# Altium PCB WDUExtensionBoard.PcbDoc
Units mm, origin at the board's own origin, x right, y up, seen from the top; angles counter-clockwise.
Board outline 97 x 22 mm, 2 copper layers (Top Layer, Bottom Layer); 36 components, 40 nets, 141 pads, 24 vias.
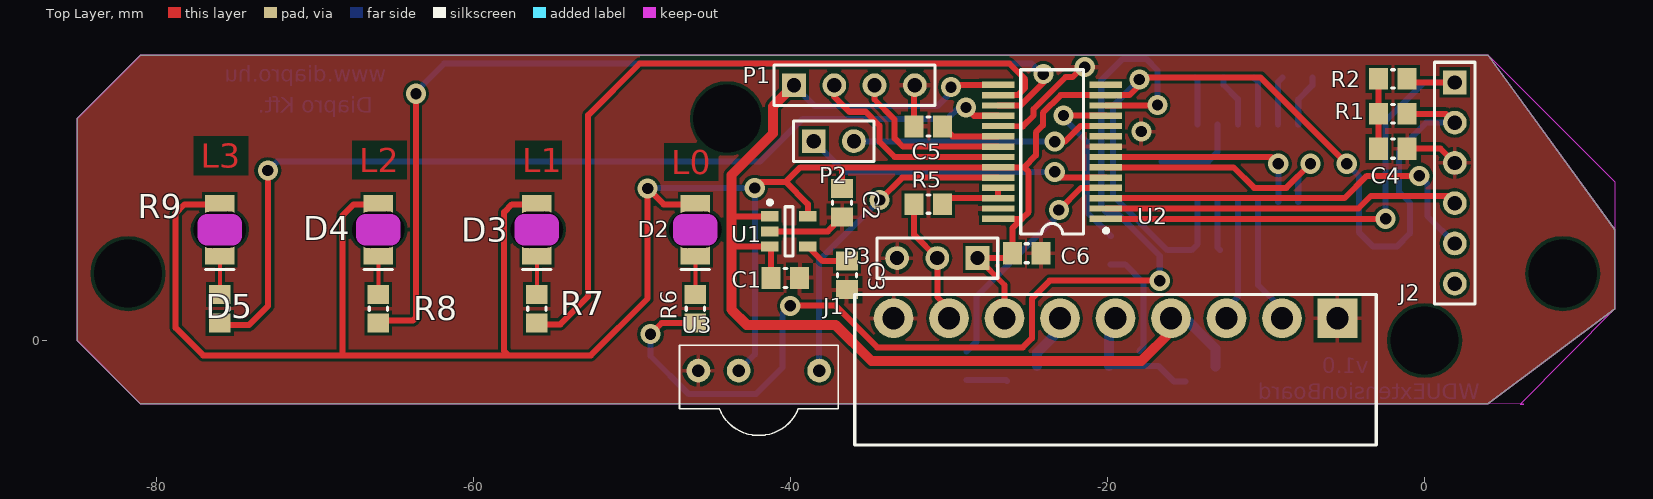
[diagram p0: Top Layer view]
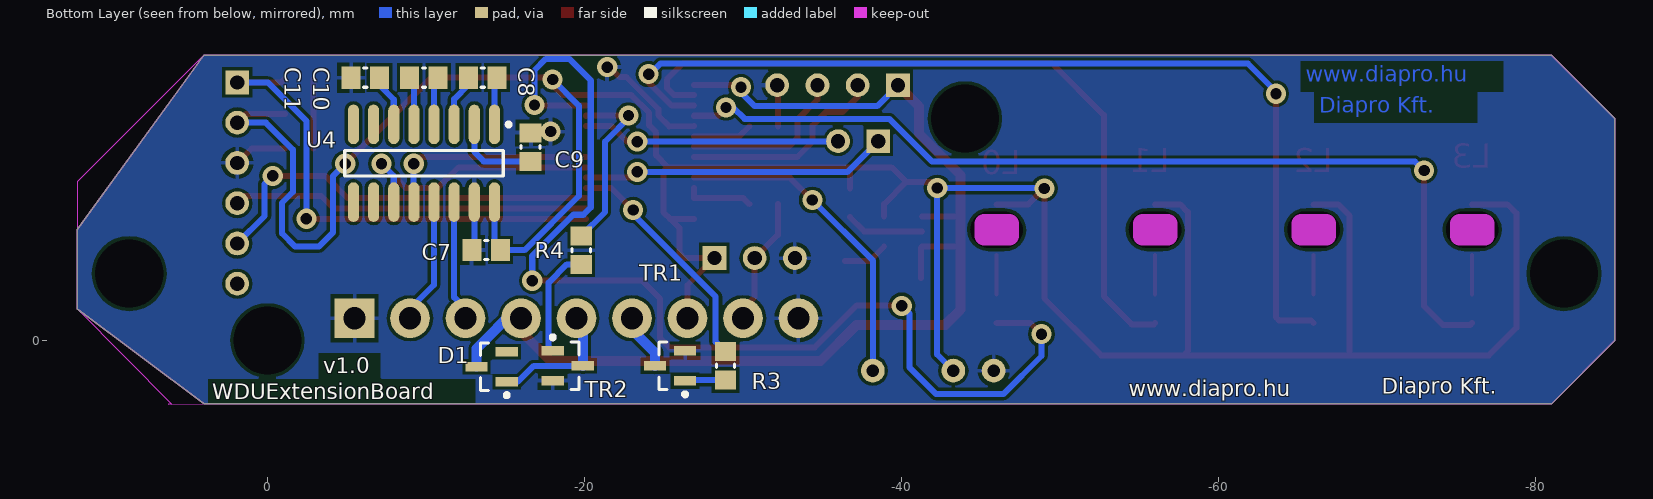
[diagram p1: Bottom Layer view, seen from below]

## Layer stack, top to bottom
Top Layer: signal copper 0.0356
Dielectric: dielectric 0.32, FR-4, Dk 4.8
Bottom Layer: signal copper 0.0356

## Board outline
-85,0 -85,14 -81,18 4,18 12,7 12,2 4,-4 -81,-4

## Design rules (kind name [scope] priority, off if disabled: settings)
AssemblyTestPointUsage [All] p1: valid=2
Clearance [Not OnLayer('Keep-Out Layer') vs Not OnLayer('Keep-Out Layer')] p1: gap=0.2
ComponentClearance [All] p1: gap=0 collisioncheckmode=3 verticalgap=0.254 showdistances=TRUE
FabricationTestpoint [All] p1 off: side=3 testpointundercomponent=TRUE minsize=1.016 maxsize=2.54 preferedsize=1.524 minholesize=0 maxholesize=1.016 preferedholesize=0.813 testpointgrid=0.025 allowsidetop=TRUE allowsidebottom=TRUE usegrid=TRUE gridtolerance=0
HoleSize [All] p1: absolutevalues=TRUE maxlimit=3.6 minlimit=0.025 maxpercent=80.000 minpercent=20.000
MinimumSolderMaskSliver [All] p1: minsoldermaskwidth=0
PolygonConnect [All] p1: connectstyle=Relief reliefconductorwidth=0.254 reliefentries=4 polygonreliefangle="90 Angle" airgapwidth=0.254
RoutingVias [All] p1: holewidth=0.254 width=0.762 viastyle="Through Hole" minholewidth=0.254 minwidth=0.762 maxholewidth=2.54 maxwidth=2.54
SilkToSilkClearance [All] p1: silktosilkclearance=0.1
SilkToSolderMaskClearance SilkscreenOverComponentPads [IsPad] p1: minsilkscreentomaskgap=0.1 clearancetoexposedcopper=TRUE
SolderMaskExpansion [All] p1: expansion=0.102
Width [All] p1: maxlimit=1.2 minlimit=0.254 preferedwidth=0.254 minimp=50.000000 maximp=50.000000 favimp=50.000000
21 further rules are at their usual default settings.

## Components (designator, comment, footprint, x,y, rotation, side; value= is the part's Value field where it differs from the comment)
C1 "CAP" "0805 CAP" -40.32,3.95 r180 top
C2 "CAP" "0805 CAP" -36.75,8.68 r90 top
C3 "CAP" "0805 CAP" -36.44,4.11 r90 top
C4 "CAP" "0805 CAP" -2,12.1 r180 top
C5 "CAP" "0805 CAP" -31.3,13.5 r180 top
C6 "CAP" "0805 CAP" -25.1,5.5 r180 top
C7 "CAP" "0805 CAP" -13.8,5.7 r0 bottom
C8 "CAP" "0805 CAP" -13.578,16.578 r180 bottom
C9 "CAP" "0805 CAP" -16.6,12.2 r90 bottom
C10 "CAP" "0805 CAP" -9.878,16.578 r0 bottom
C11 "CAP" "0805 CAP" -6.178,16.578 r0 bottom
D1 "BAV99" SOT23 -14.15,-1.65 r0 bottom
D2 "LED 0" "1206 LED Reversed" -46,6.984 r90 top
D3 "LED 1" "1206 LED Reversed" -56,6.984 r90 top
D4 "LED 2" "1206 LED Reversed" -66,6.984 r90 top
D5 "LED 3" "1206 LED Reversed" -76,6.984 r90 top
J1 "OUTPUT" "Euroblock 3.5pitch 9P" -5.5,1.4 r180 top
J2 "PIC_Kit" HDR1X6 1.9,16.28 r270 top
P1 "USB" HDR1X4 -39.78,16.1 r0 top
P2 "Watchdog" HDR1X2 -38.54,12.57 r0 top
P3 "Ext" HDR1X3 -28.2,5.2 r180 top
R1 "RES" "0805 RES" -2,14.3 r0 top
R2 "RES" "0805 RES" -2,16.5 r180 top
R3 "RES" "0805 RES" -28.9,-1.6 r90 bottom
R4 "RES" "0805 RES" -19.8,5.7 r90 bottom
R5 "RES" "0805 RES" -31.3,8.6 r0 top
R6 "RES" "0805 RES" -46,2 r270 top
R7 "RES" "0805 RES" -56,2 r270 top
R8 "RES" "0805 RES" -66,2 r270 top
R9 "RES" "0805 RES" -76,2 r270 top
TR1 "BC846" SOT23 -25.4,-1.6 r0 bottom
TR2 "BC846" SOT23 -18.95,-1.6 r180 bottom
U1 "LP3985IM5-3.3" MF05A_N -40.1,6.88 r0 top
U2 "PIC24FJ64GB002-I/SO" SSOP-28 -23.5,11.9 r90 top
U3 "TSOP1736" TSOP17xx -42,-1.9 r0 top
U4 "MAX3232CSE" NSO16_M -9.878,11.178 r270 bottom

## Footprints (in the part's own frame and the unit in brackets; to place one, negate y for a bottom-side part, rotate by r counter-clockwise, add the part's x,y. Pads: shape width x height; smd on the part's side, far side on the other; paste and mask are expansions set on the pad)
"0805 CAP" [mm] "Chip Capacitor, 2-Leads, Body 2,0x1,3mm, IPC Medium Density"
  rect 1.2x1.4 smd: 1(-0.9,0) 2(0.9,0)
  silkscreen extent -0.1,-0.6 0.1,0.6, body extent -1.05,-0.67 1.05,0.67, height 1
"0805 RES" [mm] "Chip Resistor, 2-Leads, Body 2,0x1,3mm, IPC Medium Density"
  rect 1.2x1.35 smd: 1(-0.9,0) 2(0.9,0)
  silkscreen extent -0.1,-0.58 0.1,0.58, body extent -1.05,-0.67 1.05,0.67, height 1
"1206 LED Reversed" [mm] "1206 Green LED"
  rect 1.2x1.85 smd: 1(1.6,0) 2(-1.6,0)
  Keep-Out Layer lines w1.2: -0.4,0.8 0.4,0.8 0.4,-0.8 -0.4,-0.8 -0.4,0.8
  silkscreen extent -2.5,-0.9 -2.5,0.9, body extent -1.6,-0.8 1.6,0.8, height 0.5
"Euroblock 3.5pitch 9P" [mm] "3.5 mm pitch 9P connector"
  rect 2.5x2.5 hole 1.4: 1(0,0)
  round 2.5 hole 1.4 mask+0.102: 2(3.5,0) 3(7,0) 4(10.5,0) 5(14,0) 6(17.5,0) 7(21,0) 8(24.5,0) 9(28,0)
  silkscreen extent -2.45,-1.5 30.45,8, body extent -2.45,-1.5 30.45,8, height 7.2
HDR1X2 [mm] "Connector; Header; 2 Position"
  rect 1.5x1.5 hole 0.9: 1(0,0)
  round 1.5 hole 0.9: 2(2.54,0)
  silkscreen extent -1.27,-1.27 3.81,1.27
HDR1X3 [mm] "Connector; Header; 3 Position"
  rect 1.5x1.5 hole 0.9: 1(0,0)
  round 1.5 hole 0.9: 2(2.54,0) 3(5.08,0)
  silkscreen extent -1.27,-1.27 6.35,1.27
HDR1X4 [mm] "Connector; Header; 4 Position"
  rect 1.5x1.5 hole 0.9: 1(0,0)
  round 1.5 hole 0.9: 2(2.54,0) 3(5.08,0) 4(7.62,0)
  silkscreen extent -1.27,-1.27 8.89,1.27
HDR1X6 [mm] "Connector; Header; 6 Position"
  rect 1.5x1.5 hole 0.9: 1(0,0)
  round 1.5 hole 0.9: 2(2.54,0) 3(5.08,0) 4(7.62,0) 5(10.16,0) 6(12.7,0)
  silkscreen extent -1.27,-1.27 13.97,1.27
MF05A_N [mm] "SOT23, 5-Leads, Body 2.9x1.6mm, Pitch 0.95mm, Lead Span 2.8mm, IPC Medium Density"
  rect 1.1x0.65 smd: 1(-1.2,0.95) 2(-1.2,0) 3(-1.2,-0.95) 4(1.2,-0.95) 5(1.2,0.95)
  silkscreen extent -1.32,-1.55 0.25,1.95, body extent -0.9,-1.55 0.9,1.55, height 1.19
NSO16_M [mm] "SOIC, 16-Leads, Body 9.9x3.9mm, Pitch 1.27mm, IPC Low Density"
  oval 2.5x0.7 smd: 1(-2.45,4.445) 2(-2.45,3.175) 3(-2.45,1.905) 4(-2.45,0.635) 5(-2.45,-0.635) 6(-2.45,-1.905) 7(-2.45,-3.175) 8(-2.45,-4.445) 9(2.45,-4.445) 10(2.45,-3.175) 11(2.45,-1.905) 12(2.45,-0.635) 13(2.45,0.635) 14(2.45,1.905) 15(2.45,3.175) 16(2.45,4.445)
  silkscreen extent -2.57,-5 0.8,5.47, body extent -2,-5 2,5, height 1.75
SOT23 [mm] "SOT23, 3-Leads, Body 3,0x2,5mm (max), Pitch 0,95mm, IPC Medium Density"
  rect 1.4x0.6 smd: 1(-0.95,0.95) 2(-0.95,-0.95) 3(0.95,0)
  silkscreen extent -1.07,-1.5 0.7,1.92, body extent -0.7,-1.5 0.7,1.5, height 1.1
SSOP-28 [mm] "SSOP, Plastic; 28 Leads; Body Width 5.2 mm; Pitch 0.65 mm"
  rect 0.4x2.05 smd: 1(-4.225,-3.4) 2(-3.575,-3.4) 3(-2.925,-3.4) 4(-2.275,-3.4) 5(-1.625,-3.4) 6(-0.975,-3.4) 7(-0.325,-3.4) 8(0.325,-3.4) 9(0.975,-3.4) 10(1.625,-3.4) 11(2.275,-3.4) 12(2.925,-3.4) 13(3.575,-3.4) 14(4.225,-3.4) 15(4.225,3.4) 16(3.575,3.4) 17(2.925,3.4) 18(2.275,3.4) 19(1.625,3.4) 20(0.975,3.4) 21(0.325,3.4) 22(-0.325,3.4) 23(-0.975,3.4) 24(-1.625,3.4) 25(-2.275,3.4) 26(-2.925,3.4) 27(-3.575,3.4) 28(-4.225,3.4)
  silkscreen extent -5.18,-3.52 5.17,1.98, body extent -5.1,-2.7 5.1,2.7, height 2
TSOP17xx [mm] "TSOP17xx IR Receiver"
  round 1.5 hole 0.8: 1(-3.81,0) 2(-1.27,0) 3(3.81,0)
  silkscreen extent -5,-4.09 5,1.6, body extent -5,-4.1 5,1.6, height 13.3

## Part data
C1 C2 C3 C4 C5 C6 C7 C8 C9 C10 C11: "Capacitor"
D1: "Dual Schottky series - 0.2A, 75V"
D2 D3 D4 D5: library part LED2, "Typical RED, GREEN, YELLOW, AMBER GaAs LED"
J1: library part "Euroblock 9P connector"
J2: "PIC Kit connector"
P1: library part "Header 4", "Header, 4-Pin"
P2: library part "Header 2", "Header, 2-Pin"
P3: library part "Header 3", "Header, 3-Pin"
R1 R2 R3 R4 R5 R6 R7 R8 R9: "Resistor"
TR1 TR2: "NPN Transistor, 80 V, SOT23"
U1: "Micropower, 150mA Low-Noise Ultra Low-Dropout CMOS Voltage Regulator"
U2: "16-Bit Flash Microcontroller with USB On-The-Go and nanoWatt XLP, 64KB Flash, 8KB SRAM, 28-Pin SOIC, Industrial Temperature"
U3: library part TSOP17xx, "IR Receiver, 3-Pin"
U4: "3.0V TO 5.5V, Low-Power, up to 1Mbps, True RS-232 Transceiver Using Four 0.1µF External Capacitor"

## Free pads (board coordinates)
  round 1.524 hole 4.3: 0(-81.79,4.22) 0(-44,14) 0(0,0) 0(8.71,4.22)
  oct 2x1.524 hole 2.3 slot 3.3 at 0.7 deg: 0(-76,6.984) 0(-66,6.984) 0(-56,6.984) 0(-46,6.984)

## Via types
v1: diameter 1.27, hole 0.711, Top Layer to Bottom Layer, 24 vias

## Nets (pads, with @x,y where several pads share a name; then routed paths per layer and width w, separated by ;. In a path a pad name is that pad's centre, name@x,y a point inside that pad or via, vN(x,y) a via of type N, cw(c..) or ccw(c..) an arc to the next point about the centre after c; other vN are vias at no path point)
D+: P1.3 U2.21 | length 10.6
  Top Layer w0.381: P1.3 -34.7,15.2 -33.43,13.93 -33.43,12.75 -32.905,12.225 U2.21
D-: P1.2 U2.22 | length 13.2
  Top Layer w0.381: P1.2 -37.24,15.38 -36.289,14.429 -35.259,14.429 -34.386,13.556 -34.386,12.526 -33.435,11.575 U2.22
DAT: J1.8 P3.2 R5.1 | length 7.5
  Top Layer w0.381: R5.1 -32.2,6.66 P3.2 -30.74,2.74 J1.8@-30,2
GND: C1.1 C2.1 C3.1 C4.1 C5.2 C6.1 C7.2 C9.2 C11.2 J1.1 J1.9 J2.3 P1.4 P3.3 TR1.2 TR2.2 U1.2 U2.8 U2.19 U2.27 U3.1 U4.15 | length 21.2
  Top Layer w0.381: U1.2 -37.65,6.88 C2.1 ; C5.2 -32.2,16.06 P1.4 ; U2.19 -25.34,13.51 -24.661,14.189 -24.661,14.601 -22.642,16.62 -22.21,16.62 -21.59,17.24 v1(-21.44,17.24) ; C4.1 1,12.1 J2.3
  Bottom Layer w0.381: U4.15 -13.053,5.853 C7.2
  other v1: -17.868,13.178
"INFRA IN": U2.24 U3.3 | length 20.4
  Top Layer w0.381: v1(-34.378,8.86) -32.963,10.275 U2.24
  Bottom Layer w0.381: U3.3 -38.19,5.048 v1(-34.378,8.86)
IR: R3.2 U2.4 | length 14.9
  Top Layer w0.381: v1(-23.075,8.225) -21.675,9.625 U2.4
  Bottom Layer w0.381: R3.2 -28.282,-0.082 -28.282,2.764 -23.075,7.971 v1(-23.075,8.225)
IR_OUT: J1.6 TR1.3 | length 4.2
  Bottom Layer w0.635: TR1.3 -24.45,-0.77 -23,0.68 J1.6@-23,2
LED_0: R6.2 U2.12 | length 71
  Top Layer w0.381: v1(-48.832,0.398) -48.13,1.1 R6.2 ; v1(-40.02,2.184) -40.02,2.21 -37.17,2.21 -34.53,-0.43 -25.34,-0.43 -24.78,0.13 -24.78,2.64 -23.65,3.77 v1(-16.71,3.77) ; U2.12 -16.825,14.825 v1(-16.85,14.85)
  Bottom Layer w0.381: v1(-48.832,0.398) -48.832,-0.978 -46.44,-3.37 -42.17,-3.37 -40.51,-1.71 -40.51,1.694 v1(-40.02,2.184) ; v1(-16.85,14.85) -16.85,17.039 -17.57,17.76 -19.05,17.76 -20.4,16.41 -20.4,8.4 -19.93,7.93 -19.303,7.93 -16.71,5.337 v1(-16.71,3.77) v1@-16.34,3.77
LED_1: R7.2 U2.16 | length 47.2
  Top Layer w0.381: R7.2 -55.92,1.02 -54.52,1.02 -52.76,2.78 -52.76,14.22 -49.51,17.47 -26.2,17.47 -25.2,16.47 -25.2,15.932 -25.657,15.475 U2.16
LED_2: R8.2 U2.17 | length 61.5
  Top Layer w0.381: R8.2 -65.83,1.27 -63.81,1.27 -63.63,1.45 v1(-63.63,15.56) ; U2.17 -25.485,14.825 -24.03,16.28 -24.03,16.5 -23.95,16.58 v1@-23.95,16.62
  Bottom Layer w0.381: v1(-63.63,15.56) -63.71,15.56 -63.71,15.61 -61.86,17.46 -24.79,17.46 v1@-23.95,16.62
  other v1: -24.05,16.8
LED_3: R9.2 U2.18 | length 60.1
  Top Layer w0.381: R9.2 -75.87,0.97 -74.17,0.97 -72.95,2.19 -72.95,10.74 v1(-72.97,10.72) ; v1(-28.93,14.69) -28.415,14.175 U2.18
  Bottom Layer w0.381: v1(-72.97,10.72) -72.97,10.7 -72.39,11.28 -41.93,11.28 -39.23,13.98 -30.11,13.98 -29.4,14.69 v1(-28.93,14.69)
M\C\L\R\: J2.1 R2.1 U2.1 | length 32.3
  Top Layer w0.381: U2.1 v1(-2.459,7.675) ; R2.1 -0.88,16.28 J2.1
  Bottom Layer w0.381: v1(-2.459,7.675) -2.459,13.855 -0.034,16.28 J2.1
NetC3_2: C3.2 U1.4 | length 2.8
  Top Layer w0.381: U1.4 -37.98,5.01 C3.2
NetC4_2: C4.2 R1.1 R2.2 | length 4.4
  Top Layer w0.381: C4.2 R2.2
NetC5_1: C5.1 U2.20 | length 3.8
  Top Layer w0.381: C5.1 -29.775,12.875 U2.20
NetC8_1: C8.1 U4.3 | length 3.3
  Bottom Layer w0.381: C8.1 -12.678,16.116 -11.783,15.221 U4.3
NetC8_2: C8.2 U4.1 | length 3
  Bottom Layer w0.381: C8.2 -14.323,16.423 U4.1
NetC9_1: C9.1 U4.2 | length 5.5
  Bottom Layer w0.381: C9.1 -13.65,11.3 -13.053,11.897 U4.2
NetC10_1: C10.1 U4.4 | length 3.1
  Bottom Layer w0.381: C10.1 -10.513,16.313 U4.4
NetC10_2: C10.2 U4.5 | length 3.1
  Bottom Layer w0.381: U4.5 -9.243,16.313 C10.2
NetC11_1: C11.1 U4.6 | length 3.3
  Bottom Layer w0.381: U4.6 -7.973,15.199 -7.078,16.094 C11.1
NetD2_2: D2.2 R6.1 | length 2.5
  Top Layer w0.254: R6.1 D2.2
NetD3_2: D3.2 R7.1 | length 2.5
  Top Layer w0.254: R7.1 D3.2
NetD4_2: D4.2 R8.1 | length 2.5
  Top Layer w0.254: R8.1 D4.2
NetD5_2: D5.2 R9.1 | length 2.5
  Top Layer w0.254: R9.1 D5.2
NetR3_1: R3.1 TR1.1 | length 2.6
  Bottom Layer w0.381: R3.1 -26.4,-2.5 TR1.1
NetR4_1: R4.1 TR2.1 | length 6.9
  Bottom Layer w0.381: R4.1 -18.888,4.8 -17.741,3.653 -17.741,-0.391 TR2.1
NetR5_2: R5.2 U2.25 U2.26 | length 4.3
  Top Layer w0.381: R5.2 -30.025,8.975 U2.26 U2.25
PGEC: J2.5 U2.3 | length 25.5
  Top Layer w0.381: U2.3 -5.053,8.975 -3.644,10.384 v1(-0.342,10.384)
  Bottom Layer w0.381: v1(-0.342,10.384) 0.166,9.876 0.166,7.854 J2.5
PGED: J2.4 U2.2 | length 22.5
  Top Layer w0.381: U2.2 -4.179,8.325 -3.39,9.114 1.446,9.114 J2.4
REL: R4.2 U2.11 | length 11.8
  Top Layer w0.381: v1@-22.948,14.194 -20.119,14.194 U2.11
  Bottom Layer w0.381: v1@-22.948,14.194 -21.297,12.543 -21.297,8.097 R4.2
  other v1: -22.778,14.194
REL_OUT: D1.1 J1.5 TR2.3 | length 9
  Bottom Layer w0.381: TR2.3 -16.806,-1.6 -15.806,-2.6 D1.1
  Bottom Layer w0.635: TR2.3 -19.9,1.6 J1.5@-19.5,2
RXD: U2.7 U4.12 | length 13.5
  Top Layer w0.381: U2.7 -9.661,11.575 v1(-9.232,11.146)
  Bottom Layer w0.381: U4.12 -9.232,8.739 v1(-9.232,11.146)
RXDH_2: J1.2 U4.13 | length 7.4
  Bottom Layer w0.381: U4.13 -10.513,3.513 J1.2@-9,2
TXD: U2.6 U4.11 | length 16.8
  Top Layer w0.381: U2.6 -12.059,10.925 -10.756,9.622 -8.724,9.622 v1(-7.2,11.146)
  Bottom Layer w0.381: U4.11 -7.973,10.373 v1(-7.2,11.146)
TXDH_3: J1.3 U4.14 | length 7
  Bottom Layer w0.381: J1.3@-12.5,2 -11.783,2.717 U4.14
VCC3.3V: C2.2 C6.2 C7.1 D2.1 D3.1 D4.1 D5.1 J1.7 J2.2 P3.1 R1.2 U1.5 U2.13 U2.23 U2.28 U3.2 U4.16 | length 195.8
  Top Layer w0.381: D5.1 -78.226,8.584 -78.78,8.03 -78.78,0.79 -77.05,-0.94 -68.25,-0.94 ; D4.1 -67.556,8.584 -68.25,7.89 -68.25,-0.94 ; D3.1 -57.576,8.584 -58.06,8.1 -58.06,-0.67 -57.79,-0.94 ; D2.1 -48.004,8.584 v1(-49.01,9.59) -49.01,2.65 -52.6,-0.94 -57.79,-0.94 ; v1@-42.5,9.374 v1(-42.252,9.622) -41.874,10 -40.3,10 ; U1.5 -38.9,8.6 -40.3,10 ; C2.2 -36.75,10.925 ; J1.7@-26.9,2.4 -26.5,2 -26.5,3.5 P3.1 -26.3,5.2 C6.2 -26,7.078 -25.403,7.675 ; U2.28 -25.403,7.675 ; v1(-4.914,11.146) -10.368,16.6 -17.494,16.6 -18.619,15.475 U2.13 -22.965,15.475 -24.08,14.36 -24.08,13.57 -24.52,13.13 -24.52,11.672 -25.267,10.925 ; R1.2 1.34,14.3 J2.2 ; -68.25,-0.94 -57.79,-0.94 ; -40.3,10 -39.375,10.925 -36.75,10.925 ; -36.75,10.925 U2.23 -25.267,10.925 ; -25.403,7.675 -24.98,8.098 -24.98,10.638 -25.267,10.925
  Bottom Layer w0.381: v1(-49.01,9.59) -48.978,9.622 v1(-42.252,9.622) -42.252,-0.882 U3.2 ; v1(-17.995,16.464) -19.646,14.813 -19.646,9.114 -16.232,5.7 C7.1 -14.323,6.077 U4.16 ; v1(-4.914,11.146) -4.152,10.384 -4.152,6.828 -3.263,5.939 -1.739,5.939 -0.923,6.755 -0.923,8.679 -1.612,9.368 -1.612,12.035 0.093,13.74 J2.2
VCC5V: C1.2 D1.3 J1.4 P1.1 U1.1 U1.3 U2.15 | length 73.2
  Top Layer w0.381: -43.72,6.07 -43.58,5.93 U1.3 -41.22,5.85 C1.2 ; -43.72,7.81 -43.7,7.83 U1.1 ; v1@-29.87,16.125 U2.15
  Top Layer w0.635: P1.1 -41.109,14.771 -41.109,13.051 -43.72,10.44 -43.72,7.81 -43.72,6.07 -43.72,1.946 -42.76,0.986 -37.172,0.986 -34.886,-1.3 -17.868,-1.3 -16,0.568 J1.4@-16,2
  Bottom Layer w0.381: P1.1 -38.46,14.78 -36.531,14.78 -32.63,14.78 -30.744,14.78 -29.87,15.654 v1@-29.87,16.13
  Bottom Layer w0.635: J1.4@-16,2 -15.707,2 -13.2,-0.507 D1.3
  other v1: -29.88,15.98
WD_IN: P2.1 U2.5 | length 19.4
  Top Layer w0.381: v1(-23.329,10.638) -22.966,10.275 U2.5
  Bottom Layer w0.381: P2.1 -36.608,10.638 v1(-23.329,10.638)
WD_OUT: P2.2 U2.10 | length 15.5
  Top Layer w0.381: v1(-23.329,12.543) -22.694,12.543 -21.712,13.525 U2.10
  Bottom Layer w0.381: -35.243,12.543 v1(-23.329,12.543)
pads on no net: D1.2 J2.6 U2.9 U2.14 U4.7 U4.8 U4.9 U4.10

## Polygon pours and split planes (outlines as drawn)
GND on Top Layer "Bottom Layer-No Net" (solid, pour order 8): 4.01,17.986 12,9.996 12,6.97 11.99,6.96 11.99,1.993 6.005,-3.992 4.01,-3.992 4.008,-3.99 -81.01,-3.99 -85,0 -85,0.04 -84.99,0.05 -84.99,14.01 -81,18 -80.99,18
GND on Bottom Layer "Bottom Layer-No Net" (solid, pour order 9): 4.01,17.986 12,9.996 12,6.97 11.99,6.96 11.99,1.993 6.005,-3.992 4.01,-3.992 4.008,-3.99 -81.01,-3.99 -85,0 -85,0.04 -84.99,0.05 -84.99,14.01 -81,18 -80.99,18

## Keep-outs
Keep-Out Layer:
  pour cut-out: 4,-4 12,2 6.03,-4.03 6.24,-4.01
  pour cut-out: 12,7 4,18 12,10.01
  lines w0.1: -85,0 -81,-4 4,-4 12,2 12,7 4,18 -81,18 -85,14 -85,0

## Other copper
Top Layer:
  text "L3" at -77.2,10.89 h1.52
  text "L2" at -67.2,10.61 h1.52
  text "L1" at -56.92,10.61 h1.52
  text "L0" at -47.53,10.5 h1.52
Bottom Layer:
  text "www.diapro.hu" at -65.5,16.31 h1
  text "Diapro Kft." at -66.35,14.38 h1
  text "v1.0" at -3.517,-2.062 h1
  text "WDUExtensionBoard" at 3.468,-3.713 h1

## Silkscreen, mask and mechanical layers (free items; w line width, h text height)
Bottom Overlay:
  text "v1.0" at -3.517,-2.062 h1
  text "Diapro Kft." at -70.28,-3.36 h1
  text "www.diapro.hu" at -54.32,-3.51 h1
  text "WDUExtensionBoard" at 3.468,-3.713 h1
Bottom Solder:
  text "v1.0" at -3.517,-2.062 h1
  text "Diapro Kft." at -70.28,-3.36 h1
  text "www.diapro.hu" at -54.32,-3.51 h1
  text "WDUExtensionBoard" at 3.47,-3.71 h1